# Altium PCB sumo.PcbDoc (part 2 of 2)
Units mm, origin at the board's own origin, x right, y up, seen from the top; angles counter-clockwise.
Board outline 100 x 100 mm, 2 copper layers (Top Layer, Bottom Layer); 167 components, 120 nets, 498 pads, 1066 vias.
Unrouted connection lines stored in the file: 60.
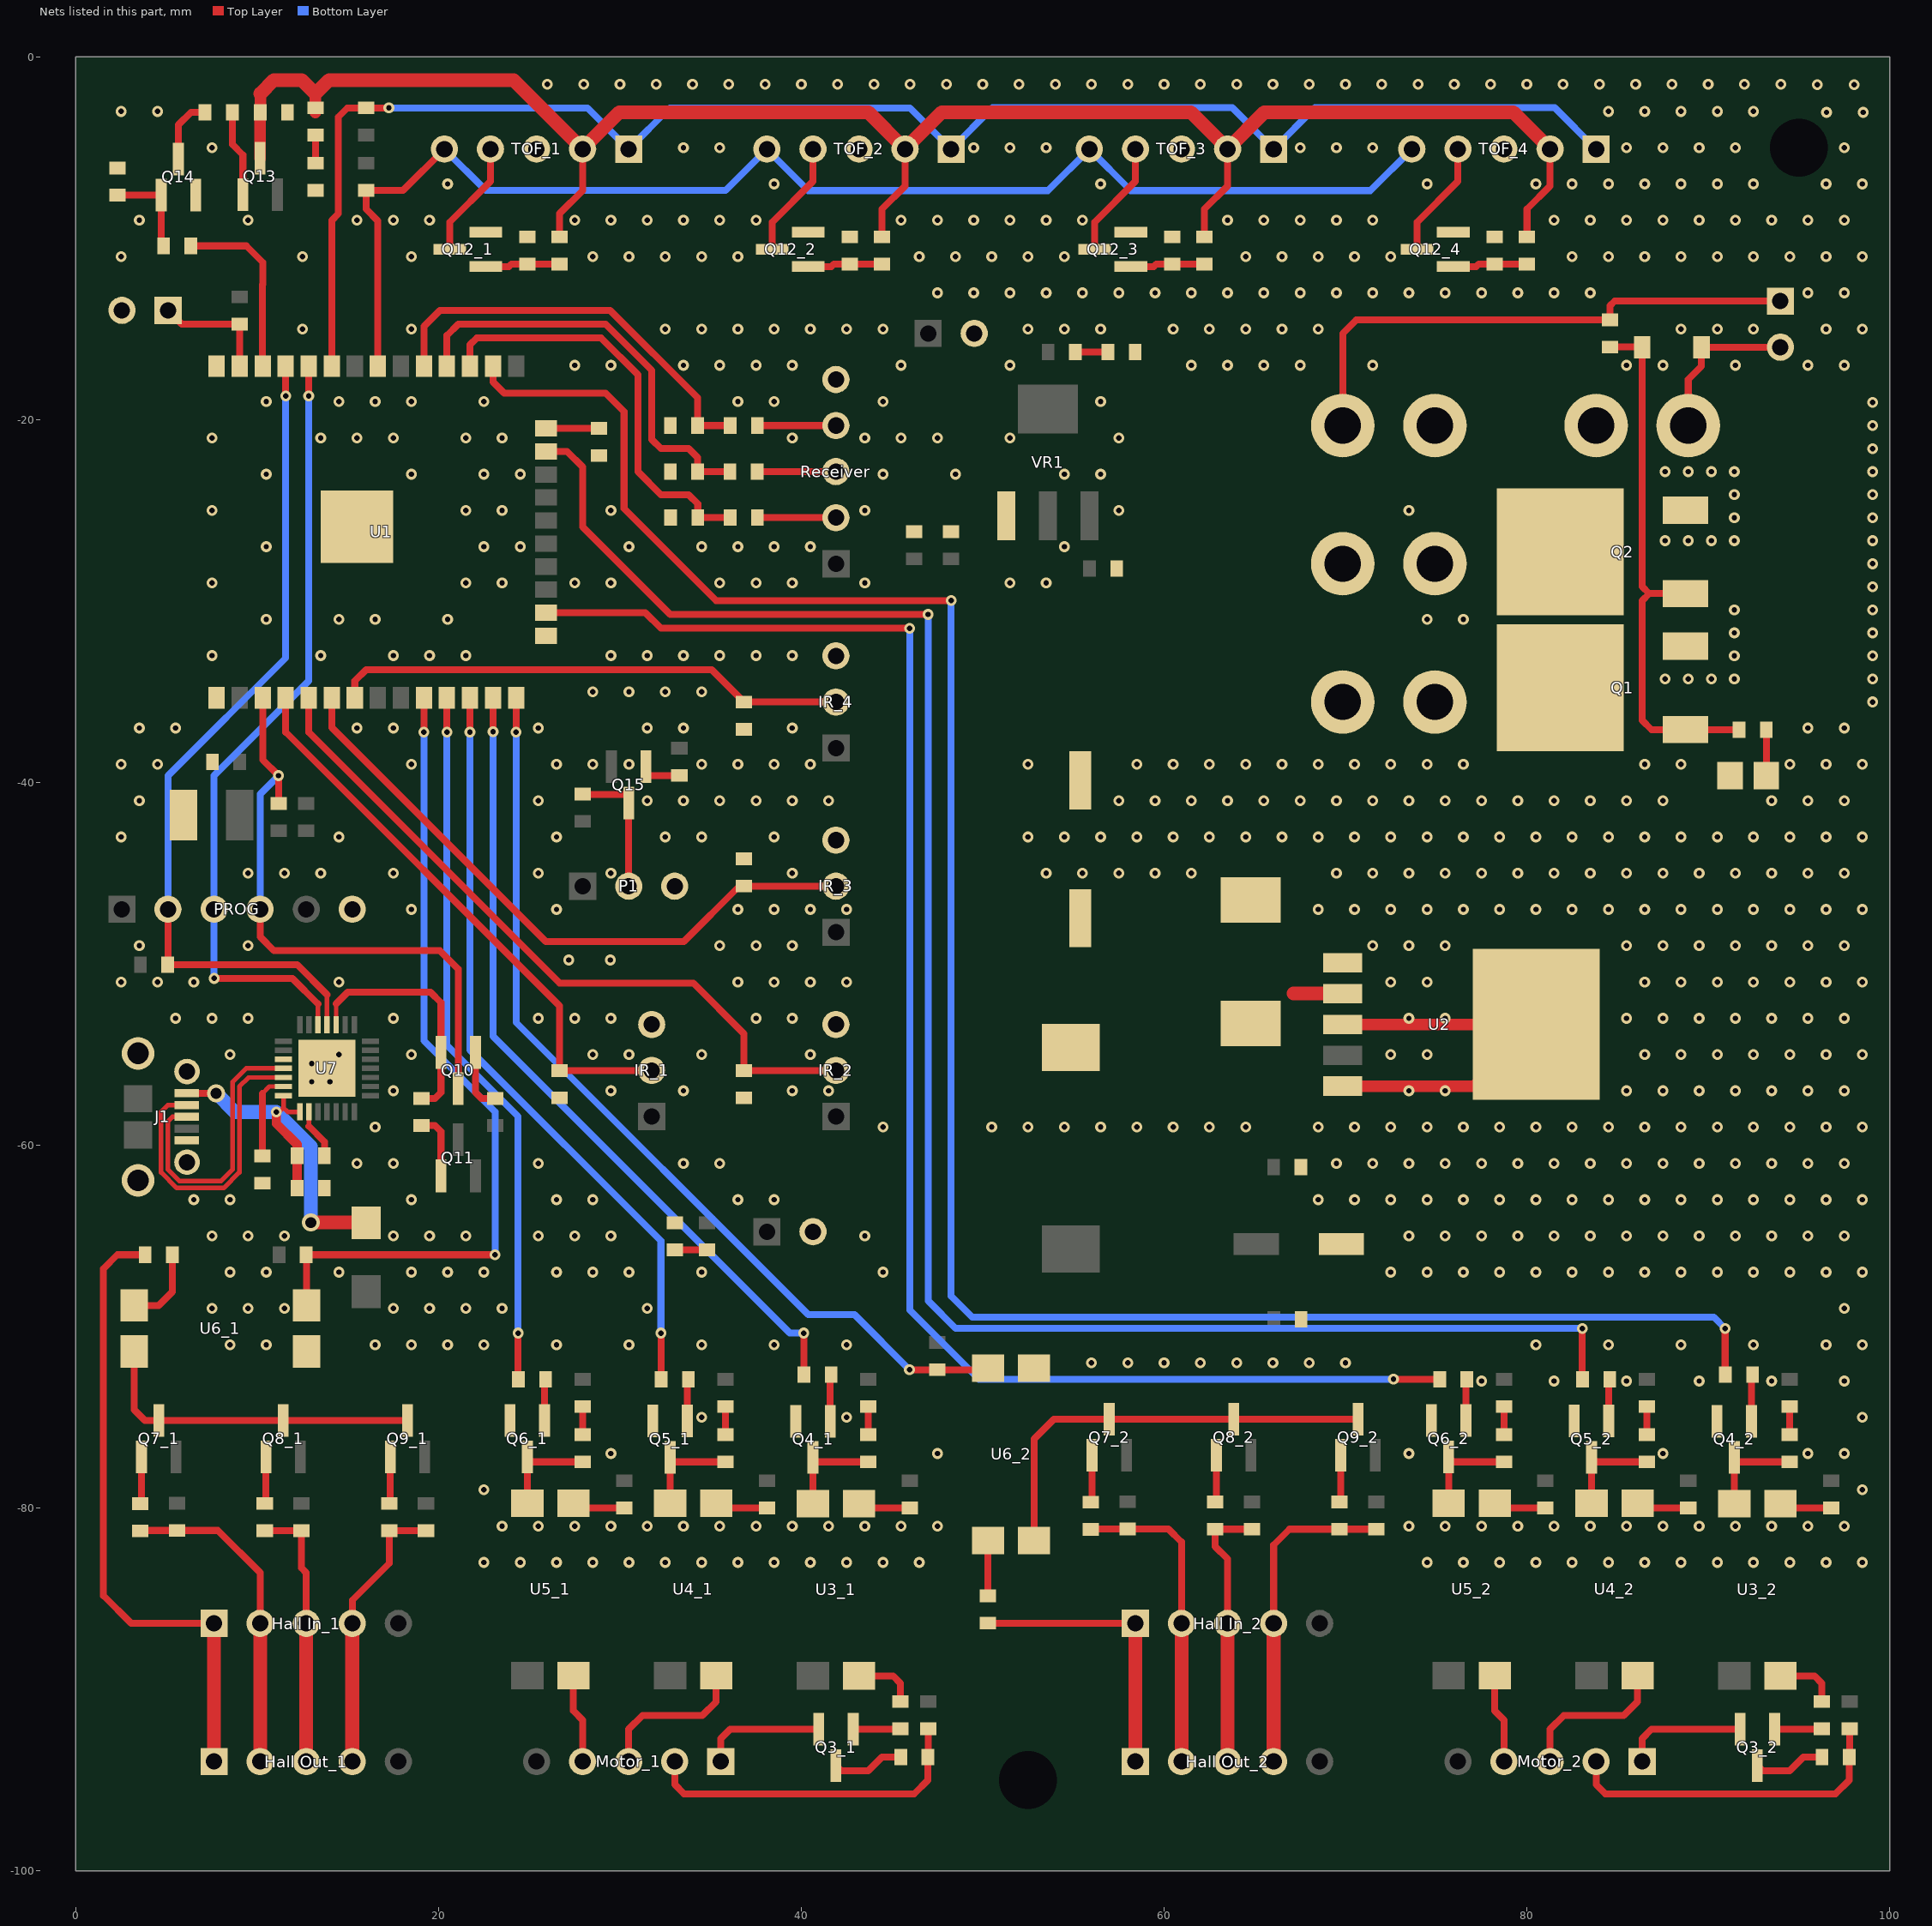
[diagram p2: the nets of this part, all layers, seen from the top]

## Via types
v1: diameter 0.6, hole 0.3, Top Layer to Bottom Layer, tented both sides, 989 vias
v2: diameter 0.6, hole 0.3, Top Layer to Bottom Layer, 38 vias
v3: diameter 0.6, hole 0.3, Top Layer to Bottom Layer, tented top, 31 vias
v4: diameter 1, hole 0.6, Top Layer to Bottom Layer, 8 vias

## Nets (pads, with @x,y where several pads share a name; then routed paths per layer and width w, separated by ;. In a path a pad name is that pad's centre, name@x,y a point inside that pad or via, vN(x,y) a via of type N, cw(c..) or ccw(c..) an arc to the next point about the centre after c; other vN are vias at no path point) (continued)
EN: PROG.4 Q10.3 R3.1 U1.3 | length 33.7
  Top Layer w0.381: PROG.4@10.16,-46.99 10.16,-48.514 10.922,-49.276 20.066,-49.276 21.082,-50.292 Q10.3@21.082,-56.88 ; U1.3@10.3,-35.335 10.3,-38.748 v2(11.176,-39.624) R3.1@11.176,-41.16
  Bottom Layer w0.381: PROG.4@10.16,-46.99 10.16,-40.64 v2(11.176,-39.624)
GND_1: 3V3.2 5V.2 "Controller 1.2" "Controller 2.2" C1.2 C2.1 C3.2 C4.2 C5.2 C6.1 C7.1 C8.1 C10.1 C11.1 C13_1.1 C13_2.1 C13_3.1 C13_4.1 C14.1 C15.1 D1.1 D7.2 D8.2 D9.2 IR_1.3 IR_2.3 IR_3.3 IR_4.3 J1.5 J1.6 J1.7 J1.8 J1.9 P1.3 P2.2 PROG.6 Q1.2 Q2.2 Q4_1.2 Q4_2.2 Q5_1.2 Q5_2.2 Q6_1.2 Q6_2.2 Q12_1.2 Q12_2.2 Q12_3.2 Q12_4.2 Q14.2 R8.1 R34.1 R35.1 R36.1 R37_1.1 R37_2.1 R37_3.1 R37_4.1 R38.2 R42.1 Receiver.5 TOF_1.3 TOF_2.3 TOF_3.3 TOF_4.3 U1.1 U1.15 U1.38 U1.39 U2.3 U2.5 U2.6 U6_1.3 U6_2.3 U7.3 U7.29 VR1.1 | length 23
  Top Layer w0.381: Q5_1.2@31.75,-74.676 Q5_1.2@31.816,-74.742 ; Q5_1.2@31.816,-75.2 Q5_1.2@31.832,-75.184 ; Q5_2.2@82.55,-74.676 Q5_2.2@82.616,-74.742 ; Q5_2.2@82.616,-75.2 Q5_2.2@82.632,-75.184
  Top Layer w0.635: U2.5@69.843,-56.74 77.118,-56.74 U2.6@80.518,-53.34 U2.3@69.843,-53.34
  other v1: 22.5,-83 24.5,-83 26.5,-83 28.5,-83 30.5,-83 32.5,-83 34.5,-83 36.5,-83 38.5,-83 40.5,-83 42.5,-83 44.5,-83 46.5,-83 74.5,-83 76.5,-83 78.5,-83 80.5,-83 82.5,-83 84.5,-83 86.5,-83 88.5,-83 90.5,-83 92.5,-83 94.5,-83 96.5,-83 98.5,-83 23.5,-81 25.5,-81 27.5,-81 29.5,-81 31.5,-81 33.5,-81 35.5,-81 37.5,-81 39.5,-81 41.5,-81 43.5,-81 45.5,-81 47.5,-81 73.5,-81 75.5,-81 77.5,-81 79.5,-81 81.5,-81 83.5,-81 85.5,-81 87.5,-81 89.5,-81 91.5,-81 93.5,-81 95.5,-81 97.5,-81 22.5,-79 98.5,-79 29.5,-77 47.5,-77 73.5,-77 87.5,-77 95.5,-77 97.5,-77 34.5,-75 42.5,-75 98.5,-75 77.5,-73 81.5,-73 85.5,-73 89.5,-73 93.5,-73 97.5,-73 56,-72 58,-72 60,-72 62,-72 64,-72 66,-72 68,-72 70,-72 8.5,-71 10.5,-71 16.5,-71 18.5,-71 20.5,-71 22.5,-71 26.5,-71 30.5,-71 34.5,-71 38.5,-71 42.5,-71 80.5,-71 84.5,-71 88.5,-71 92.5,-71 96.5,-71 98.5,-71 7.5,-69 9.5,-69 11.5,-69 17.5,-69 19.5,-69 21.5,-69 23.5,-69 31.5,-69 97.5,-69 8.5,-67 10.5,-67 14.5,-67 18.5,-67 20.5,-67 22.5,-67 26.5,-67 28.5,-67 30.5,-67 34.5,-67 44.5,-67 72.5,-67 74.5,-67 76.5,-67 78.5,-67 80.5,-67 82.5,-67 84.5,-67 86.5,-67 88.5,-67 90.5,-67 92.5,-67 94.5,-67 96.5,-67 98.5,-67 7.5,-65 9.5,-65 11.5,-65 17.5,-65 19.5,-65 21.5,-65 25.5,-65 27.5,-65 29.5,-65 43.5,-65 73.5,-65 75.5,-65 77.5,-65 79.5,-65 81.5,-65 83.5,-65 85.5,-65 87.5,-65 89.5,-65 91.5,-65 93.5,-65 95.5,-65 97.5,-65 6.5,-63 8.5,-63 18.5,-63 26.5,-63 28.5,-63 36.5,-63 38.5,-63 68.5,-63 70.5,-63 72.5,-63 74.5,-63 76.5,-63 78.5,-63 80.5,-63 82.5,-63 84.5,-63 86.5,-63 88.5,-63 90.5,-63 92.5,-63 94.5,-63 96.5,-63 98.5,-63 15.5,-61 17.5,-61 25.5,-61 33.5,-61 35.5,-61 69.5,-61 71.5,-61 73.5,-61 75.5,-61 77.5,-61 79.5,-61 81.5,-61 83.5,-61 85.5,-61 87.5,-61 89.5,-61 91.5,-61 93.5,-61 95.5,-61 97.5,-61 16.5,-59 44.5,-59 50.5,-59 52.5,-59 54.5,-59 56.5,-59 58.5,-59 60.5,-59 62.5,-59 64.5,-59 68.5,-59 70.5,-59 72.5,-59 74.5,-59 76.5,-59 78.5,-59 80.5,-59 82.5,-59 84.5,-59 86.5,-59 88.5,-59 90.5,-59 92.5,-59 94.5,-59 96.5,-59 98.5,-59 17.5,-57 29.5,-57 33.5,-57 39.5,-57 41.5,-57 73.5,-57 75.5,-57 85.5,-57 87.5,-57 89.5,-57 91.5,-57 93.5,-57 95.5,-57 97.5,-57 8.5,-55 18.5,-55 28.5,-55 30.5,-55 34.5,-55 40.5,-55 72.5,-55 74.5,-55 86.5,-55 88.5,-55 90.5,-55 92.5,-55 94.5,-55 96.5,-55 98.5,-55 5.5,-53 7.5,-53 9.5,-53 17.5,-53 25.5,-53 27.5,-53 29.5,-53 37.5,-53 39.5,-53 73.5,-53 75.5,-53 85.5,-53 87.5,-53 89.5,-53 91.5,-53 93.5,-53 95.5,-53 97.5,-53 2.5,-51 4.5,-51 6.5,-51 14.5,-51 36.5,-51 38.5,-51 40.5,-51 42.5,-51 72.5,-51 74.5,-51 86.5,-51 88.5,-51 90.5,-51 92.5,-51 94.5,-51 96.5,-51 98.5,-51 3.5,-49 9.5,-49 35.5,-49 37.5,-49 39.5,-49 71.5,-49 73.5,-49 75.5,-49 85.5,-49 87.5,-49 89.5,-49 91.5,-49 93.5,-49 95.5,-49 97.5,-49 18.5,-47 26.5,-47 36.5,-47 38.5,-47 40.5,-47 42.5,-47 68.5,-47 70.5,-47 72.5,-47 74.5,-47 76.5,-47 78.5,-47 80.5,-47 82.5,-47 84.5,-47 86.5,-47 88.5,-47 90.5,-47 92.5,-47 94.5,-47 96.5,-47 98.5,-47 9.5,-45 11.5,-45 13.5,-45 17.5,-45 25.5,-45 29.5,-45 39.5,-45 53.5,-45 55.5,-45 57.5,-45 59.5,-45 61.5,-45 69.5,-45 71.5,-45 73.5,-45 75.5,-45 77.5,-45 79.5,-45 81.5,-45 83.5,-45 85.5,-45 87.5,-45 89.5,-45 91.5,-45 93.5,-45 95.5,-45 97.5,-45 2.5,-43 14.5,-43 26.5,-43 32.5,-43 34.5,-43 38.5,-43 52.5,-43 54.5,-43 56.5,-43 58.5,-43 60.5,-43 62.5,-43 64.5,-43 66.5,-43 68.5,-43 70.5,-43 72.5,-43 74.5,-43 76.5,-43 78.5,-43 80.5,-43 82.5,-43 84.5,-43 86.5,-43 88.5,-43 90.5,-43 92.5,-43 94.5,-43 96.5,-43 98.5,-43 3.5,-41 25.5,-41 31.5,-41 33.5,-41 35.5,-41 37.5,-41 39.5,-41 41.5,-41 57.5,-41 59.5,-41 61.5,-41 63.5,-41 65.5,-41 67.5,-41 69.5,-41 71.5,-41 73.5,-41 75.5,-41 77.5,-41 79.5,-41 81.5,-41 83.5,-41 85.5,-41 87.5,-41 93.5,-41 95.5,-41 97.5,-41 2.5,-39 4.5,-39 18.5,-39 26.5,-39 28.5,-39 30.5,-39 34.5,-39 36.5,-39 38.5,-39 40.5,-39 52.5,-39 58.5,-39 60.5,-39 62.5,-39 64.5,-39 66.5,-39 68.5,-39 70.5,-39 72.5,-39 74.5,-39 76.5,-39 86.5,-39 88.5,-39 94.5,-39 96.5,-39 98.5,-39 3.5,-37 5.5,-37 15.5,-37 17.5,-37 25.5,-37 31.5,-37 33.5,-37 39.5,-37 95.5,-37 97.5,-37 28.5,-35 30.5,-35 32.5,-35 34.5,-35 7.5,-33 13.5,-33 17.5,-33 19.5,-33 21.5,-33 29.5,-33 31.5,-33 33.5,-33 35.5,-33 37.5,-33 39.5,-33 10.5,-31 14.5,-31 16.5,-31 20.5,-31 74.5,-31 76.5,-31 7.5,-29 21.5,-29 23.5,-29 27.5,-29 29.5,-29 35.5,-29 37.5,-29 39.5,-29 43.5,-29 51.5,-29 53.5,-29 10.5,-27 22.5,-27 24.5,-27 30.5,-27 34.5,-27 36.5,-27 38.5,-27 40.5,-27 54.5,-27 7.5,-25 21.5,-25 23.5,-25 29.5,-25 43.5,-25 57.5,-25 73.5,-25 10.5,-23 18.5,-23 22.5,-23 24.5,-23 44.5,-23 48.5,-23 54.5,-23 56.5,-23 7.5,-21 13.5,-21 15.5,-21 17.5,-21 21.5,-21 23.5,-21 39.5,-21 43.5,-21 45.5,-21 47.5,-21 51.5,-21 57.5,-21 10.5,-19 14.5,-19 16.5,-19 18.5,-19 22.5,-19 36.5,-19 38.5,-19 44.5,-19 56.5,-19 27.5,-17 29.5,-17 33.5,-17 35.5,-17 37.5,-17 39.5,-17 45.5,-17 51.5,-17 61.5,-17 63.5,-17 65.5,-17 67.5,-17 71.5,-17 85.5,-17 87.5,-17 91.5,-17 95.5,-17 97.5,-17 12.5,-15 18.5,-15 32.5,-15 34.5,-15 36.5,-15 38.5,-15 40.5,-15 42.5,-15 44.5,-15 52.5,-15 54.5,-15 56.5,-15 60.5,-15 62.5,-15 64.5,-15 66.5,-15 68.5,-15 88.5,-15 90.5,-15 92.5,-15 96.5,-15 98.5,-15 47.5,-13 49.5,-13 51.5,-13 53.5,-13 55.5,-13 57.5,-13 59.5,-13 61.5,-13 63.5,-13 65.5,-13 67.5,-13 69.5,-13 71.5,-13 73.5,-13 75.5,-13 77.5,-13 79.5,-13 81.5,-13 83.5,-13 95.5,-13 97.5,-13 2.5,-11 12.5,-11 18.5,-11 28.5,-11 30.5,-11 32.5,-11 34.5,-11 36.5,-11 46.5,-11 48.5,-11 50.5,-11 52.5,-11 54.5,-11 64.5,-11 66.5,-11 68.5,-11 70.5,-11 72.5,-11 82.5,-11 84.5,-11 86.5,-11 88.5,-11 90.5,-11 92.5,-11 94.5,-11 96.5,-11 98.5,-11 3.5,-9 9.5,-9 15.5,-9 17.5,-9 19.5,-9 27.5,-9 29.5,-9 31.5,-9 33.5,-9 35.5,-9 37.5,-9 45.5,-9 47.5,-9 49.5,-9 51.5,-9 53.5,-9 55.5,-9 63.5,-9 65.5,-9 67.5,-9 69.5,-9 71.5,-9 81.5,-9 83.5,-9 85.5,-9 87.5,-9 89.5,-9 91.5,-9 93.5,-9 95.5,-9 97.5,-9 20.5,-7 38.5,-7 56.5,-7 74.5,-7 80.5,-7 82.5,-7 84.5,-7 86.5,-7 88.5,-7 90.5,-7 92.5,-7 96.5,-7 98.5,-7 7.5,-5 33.5,-5 35.5,-5 49.5,-5 51.5,-5 53.5,-5 67.5,-5 69.5,-5 71.5,-5 85.5,-5 87.5,-5 89.5,-5 91.5,-5 97.5,-5 96.52,-3.048 98.552,-3.048 2.5,-3 4.5,-3 84.5,-3 86.5,-3 88.5,-3 90.5,-3 92.5,-3 96.012,-1.524 98.044,-1.524 26,-1.5 28,-1.5 30,-1.5 32,-1.5 34,-1.5 36,-1.5 38,-1.5 40,-1.5 42,-1.5 44,-1.5 46,-1.5 48,-1.5 50,-1.5 52,-1.5 54,-1.5 56,-1.5 58,-1.5 60,-1.5 62,-1.5 64,-1.5 66,-1.5 68,-1.5 70,-1.5 72,-1.5 74,-1.5 76,-1.5 78,-1.5 80,-1.5 82,-1.5 84,-1.5 86,-1.5 88,-1.5 90,-1.5 92,-1.5 94,-1.5
  other v2: 13,-56.5 14,-56.5 13,-55.5 14.5,-55 27.178,-49.784 29.464,-49.784
HALL_U_1: "Hall In_1.2" "Hall Out_1.2" R22_1.2 R25_1.2 | length 18
  Top Layer w0.381: R22_1.2@3.556,-81.264 3.58,-81.24 R25_1.2@5.588,-81.24 7.834,-81.24 10.16,-83.566 10.16,-86.36
  Top Layer w0.762: 10.16,-93.98 10.16,-86.36
HALL_U_2: "Hall In_2.2" "Hall Out_2.2" R22_2.2 R25_2.2 | length 17.4
  Top Layer w0.381: R22_2.2@55.961,-81.18 55.985,-81.156 R25_2.2@57.993,-81.156 60.239,-81.156 60.96,-81.877 60.96,-86.36
  Top Layer w0.762: 60.96,-93.98 60.96,-86.36
HALL_V_1: "Hall In_1.4" "Hall Out_1.4" R24_1.2 R27_1.2 | length 15.6
  Top Layer w0.381: 15.24,-86.36 15.24,-85.09 17.272,-83.058 R24_1.2@17.272,-81.252 R27_1.2@19.304,-81.252
  Top Layer w0.762: 15.24,-93.98 15.24,-86.36
HALL_V_2: "Hall In_2.4" "Hall Out_2.4" R24_2.2 R27_2.2 | length 18
  Top Layer w0.381: 66.04,-86.36 66.04,-82.042 66.914,-81.168 R24_2.2@69.677,-81.168 R27_2.2@71.709,-81.168
  Top Layer w0.762: 66.04,-93.98 66.04,-86.36
HALL_VCC_1: "Hall In_1.1" "Hall Out_1.1" R20_1.2 | length 35
  Top Layer w0.381: R20_1.2@3.822,-66.04 2.286,-66.04 1.524,-66.802 1.524,-84.836 3.048,-86.36 7.62,-86.36
  Top Layer w0.762: 7.62,-93.98 7.62,-86.36
HALL_VCC_2: "Hall In_2.1" "Hall Out_2.1" R20_2.2 | length 15.8
  Top Layer w0.381: R20_2.2@50.292,-86.348 58.408,-86.348 58.42,-86.36
  Top Layer w0.762: 58.42,-93.98 58.42,-86.36
HALL_W_1: "Hall In_1.3" "Hall Out_1.3" R23_1.2 R26_1.2 | length 14.9
  Top Layer w0.381: R23_1.2@10.414,-81.252 R26_1.2@12.446,-81.252 12.446,-83.312 12.7,-83.566 12.7,-86.36
  Top Layer w0.762: 12.7,-93.98 12.7,-86.36
HALL_W_2: "Hall In_2.3" "Hall Out_2.3" R23_2.2 R26_2.2 | length 15.1
  Top Layer w0.381: 63.5,-86.36 63.5,-82.804 62.819,-82.123 R23_2.2@62.819,-81.168 R26_2.2@64.851,-81.168
  Top Layer w0.762: 63.5,-93.98 63.5,-86.36
M_BRAKE_1: Motor_1.4 U5_1.4 | length 5
  Top Layer w0.381: U5_1.4@27.432,-89.24 27.432,-91.186 27.94,-91.694 Motor_1.4@27.94,-93.98
M_BRAKE_2: Motor_2.4 U5_2.4 | length 5
  Top Layer w0.381: U5_2.4@78.232,-89.24 78.232,-91.186 78.74,-91.694 Motor_2.4@78.74,-93.98
M_DIR_1: Motor_1.3 U4_1.4 | length 8.7
  Top Layer w0.381: Motor_1.3@30.48,-93.98 30.48,-92.202 31.242,-91.44 34.544,-91.44 35.306,-90.678 U4_1.4@35.306,-89.24
M_DIR_2: Motor_2.3 U4_2.4 | length 8.7
  Top Layer w0.381: Motor_2.3@81.28,-93.98 81.28,-92.202 82.042,-91.44 85.344,-91.44 86.106,-90.678 U4_2.4@86.106,-89.24
M_THROTTLE_1: C9_1.2 Motor_1.2 R16_1.1 | length 18.6
  Top Layer w0.381: Motor_1.2@33.02,-93.98 33.02,-95.25 33.528,-95.758 46.228,-95.758 46.978,-95.008 R16_1.1@46.978,-93.726 46.99,-93.714 C9_1.2@46.99,-92.174
M_THROTTLE_2: C9_2.2 Motor_2.2 R16_2.1 | length 18.6
  Top Layer w0.381: Motor_2.2@83.82,-93.98 83.82,-95.25 84.328,-95.758 97.028,-95.758 97.778,-95.008 R16_2.1@97.778,-93.726 97.79,-93.714 C9_2.2@97.79,-92.174
M_VCC_1: Motor_1.1 Q3_1.2 | length 6.9
  Top Layer w0.381: Motor_1.1@35.56,-93.98 35.56,-92.71 36.068,-92.202 Q3_1.2@40.96,-92.202
M_VCC_2: Motor_2.1 Q3_2.2 | length 6.9
  Top Layer w0.381: Motor_2.1@86.36,-93.98 86.36,-92.71 86.868,-92.202 Q3_2.2@91.76,-92.202
NetBT1_2: BT1.2 BT2.1
NetBT2_2: BT2.2 D2.1 Q1.3 Q2.3 VBAT.2 | length 9
  Top Layer w0.381: BT2.2@88.9,-20.32 88.9,-17.78 89.63,-17.05 D2.1@89.63,-16.002 VBAT.2@93.98,-16.002
  other v3: 99.06,-35.56 87.63,-34.29 88.9,-34.29 90.17,-34.29 91.44,-34.29 99.06,-34.29 91.44,-33.02 99.06,-33.02 91.44,-31.75 99.06,-31.75 91.44,-30.48 99.06,-30.48 99.06,-29.21 99.06,-27.94 87.63,-26.67 88.9,-26.67 90.17,-26.67 91.44,-26.67 99.06,-26.67 91.44,-25.4 99.06,-25.4 91.44,-24.13 99.06,-24.13 87.63,-22.86 88.9,-22.86 90.17,-22.86 91.44,-22.86 99.06,-22.86 99.06,-21.59 99.06,-20.32 99.06,-19.05
NetC6_2: C6.2 R2.2 | length 2.5
  Top Layer w0.381: C6.2@93.202,-39.624 93.206,-39.62 R2.2@93.206,-37.084
NetC11_2: C11.2 U7.6 | length 4.8
  Top Layer w0.254: 10.287,-57.15 10.673,-56.764 U7.6@11.449,-56.764
  Top Layer w0.381: C11.2@10.287,-60.591 10.287,-57.15
NetC12_1_2: C12_1.2 Q12_1.1 R37_1.2 | length 4.1
  Top Layer w0.381: Q12_1.1@22.606,-11.552 23.876,-11.552 24.01,-11.418 R37_1.2@24.892,-11.418 C12_1.2@26.67,-11.418
NetC12_2_2: C12_2.2 Q12_2.1 R37_2.2 | length 4.1
  Top Layer w0.381: Q12_2.1@40.386,-11.552 41.656,-11.552 41.79,-11.418 R37_2.2@42.672,-11.418 C12_2.2@44.45,-11.418
NetC12_3_2: C12_3.2 Q12_3.1 R37_3.2 | length 4.1
  Top Layer w0.381: Q12_3.1@58.166,-11.552 59.436,-11.552 59.57,-11.418 R37_3.2@60.452,-11.418 C12_3.2@62.23,-11.418
NetC12_4_2: C12_4.2 Q12_4.1 R37_4.2 | length 4.1
  Top Layer w0.381: Q12_4.1@75.946,-11.552 77.216,-11.552 77.35,-11.418 R37_4.2@78.232,-11.418 C12_4.2@80.01,-11.418
NetC13_1_2: C13_1.2 IR_1.2 U1.4 | length 31.9
  Top Layer w0.381: U1.4@11.57,-35.335 11.57,-37.224 26.67,-52.324 C13_1.2@26.67,-55.892 ; C13_1.2@26.67,-55.88 IR_1.2@31.75,-55.88
NetC13_2_2: C13_2.2 IR_2.2 U1.5 | length 39.9
  Top Layer w0.381: U1.5@12.84,-35.335 12.84,-37.224 26.67,-51.054 34.036,-51.054 36.83,-53.848 C13_2.2@36.83,-55.892 ; C13_2.2@36.83,-55.88 IR_2.2@41.91,-55.88
NetC13_3_2: C13_3.2 IR_3.2 U1.6 | length 35.6
  Top Layer w0.381: U1.6@14.11,-35.335 14.11,-36.97 25.908,-48.768 33.528,-48.768 36.564,-45.732 C13_3.2@36.83,-45.732 ; C13_3.2@36.83,-45.72 IR_3.2@41.91,-45.72
NetC13_4_2: C13_4.2 IR_4.2 U1.7 | length 28.5
  Top Layer w0.381: U1.7@15.38,-35.335 15.38,-34.404 16.002,-33.782 35.052,-33.782 C13_4.2@36.83,-35.56 ; C13_4.2@36.83,-35.572 C13_4.2@36.83,-35.56 ; IR_4.2@41.91,-35.56 C13_4.2@36.83,-35.56
NetD1_2: D1.2 L1.1 U2.2 | length 2.7
  Top Layer w0.762: 67.134,-51.64 U2.2@69.843,-51.64
NetD2_2: D2.2 Q1.1 Q2.1 R1.1 R2.1 | length 30.2
  Top Layer w0.381: R1.1@84.582,-15.99 86.348,-15.99 D2.2@86.36,-16.002 86.36,-29.196 86.748,-29.584 ; Q2.1@88.74,-29.584 86.748,-29.584 ; R2.1@91.706,-37.084 Q1.1@88.74,-37.084 86.868,-37.084 86.36,-36.576 86.36,-29.972 86.748,-29.584
NetD3_1_1: D3_1.1 R10_1.1 | length 1.5
  Top Layer w0.381: D3_1.1@43.688,-75.958 R10_1.1@43.688,-74.41
NetD3_1_2: D3_1.2 Q4_1.3 U3_1.2 | length 5.7
  Top Layer w0.381: U3_1.2@40.64,-79.756 Q4_1.3@40.64,-77.216 40.882,-77.458 D3_1.2@43.688,-77.458
NetD3_2_1: D3_2.1 R10_2.1 | length 1.5
  Top Layer w0.381: D3_2.1@94.488,-75.958 R10_2.1@94.488,-74.41
NetD3_2_2: D3_2.2 Q4_2.3 U3_2.2 | length 5.7
  Top Layer w0.381: U3_2.2@91.44,-79.756 Q4_2.3@91.44,-77.216 91.682,-77.458 D3_2.2@94.488,-77.458
NetD4_1_1: D4_1.1 R12_1.1 | length 1.5
  Top Layer w0.381: D4_1.1@35.814,-75.958 R12_1.1@35.814,-74.41
NetD4_1_2: D4_1.2 Q5_1.3 U4_1.2 | length 5.7
  Top Layer w0.381: U4_1.2@32.766,-79.74 Q5_1.3@32.766,-77.2 33.024,-77.458 D4_1.2@35.814,-77.458
NetD4_2_1: D4_2.1 R12_2.1 | length 1.5
  Top Layer w0.381: D4_2.1@86.614,-75.958 R12_2.1@86.614,-74.41
NetD4_2_2: D4_2.2 Q5_2.3 U4_2.2 | length 5.7
  Top Layer w0.381: U4_2.2@83.566,-79.74 Q5_2.3@83.566,-77.2 83.824,-77.458 D4_2.2@86.614,-77.458
NetD5_1_1: D5_1.1 R14_1.1 | length 1.5
  Top Layer w0.381: D5_1.1@27.94,-75.958 R14_1.1@27.94,-74.41
NetD5_1_2: D5_1.2 Q6_1.3 U5_1.2 | length 5.7
  Top Layer w0.381: U5_1.2@24.892,-79.74 Q6_1.3@24.892,-77.184 25.166,-77.458 D5_1.2@27.94,-77.458
NetD5_2_1: D5_2.1 R14_2.1 | length 1.5
  Top Layer w0.381: D5_2.1@78.74,-75.958 R14_2.1@78.74,-74.41
NetD5_2_2: D5_2.2 Q6_2.3 U5_2.2 | length 5.7
  Top Layer w0.381: U5_2.2@75.692,-79.74 Q6_2.3@75.692,-77.184 75.966,-77.458 D5_2.2@78.74,-77.458
NetD7_1: D7.1 R45.1 | length 1.8
  Top Layer w0.381: R45.1@55.106,-16.256 D7.1@56.908,-16.256
NetD8_1: D8.1 R46.1 | length 1.8
  Top Layer w0.381: D8.1@33.02,-65.774 R46.1@34.798,-65.774
NetD9_1: D9.1 R47.1 | length 1.5
  Top Layer w0.381: D9.1@13.208,-5.854 R47.1@13.208,-4.306
NetJ1_2: J1.2 U7.5 | length 17.3
  Top Layer w0.254: J1.2@6.104,-57.786 5.079,-57.786 4.699,-58.166 4.699,-61.499 5.557,-62.357 8.159,-62.357 9.017,-61.499 9.017,-56.769 9.522,-56.264 U7.5@11.449,-56.264
NetJ1_3: J1.3 U7.4 | length 15.8
  Top Layer w0.254: J1.3@6.104,-58.436 5.318,-58.436 5.08,-58.674 5.08,-61.341 5.715,-61.976 8.001,-61.976 8.636,-61.341 8.636,-56.515 9.387,-55.764 U7.4@11.449,-55.764
NetP1_2: P1.2 Q15.3 R44.1 | length 7.9
  Top Layer w0.381: R44.1@27.686,-40.652 30.48,-40.652 Q15.3@30.48,-41.132 P1.2@30.48,-45.72
NetQ3_1_1: Q3_1.1 R15_1.2 | length 2.6
  Top Layer w0.381: Q3_1.1@42.86,-92.202 45.438,-92.202 R15_1.2@45.466,-92.174
NetQ3_1_3: Q3_1.3 R16_1.2 | length 4
  Top Layer w0.381: Q3_1.3@41.91,-94.202 42.196,-94.488 43.688,-94.488 44.45,-93.726 R16_1.2@45.478,-93.726
NetQ3_2_1: Q3_2.1 R15_2.2 | length 2.6
  Top Layer w0.381: Q3_2.1@93.66,-92.202 96.238,-92.202 R15_2.2@96.266,-92.174
NetQ3_2_3: Q3_2.3 R16_2.2 | length 4
  Top Layer w0.381: Q3_2.3@92.71,-94.202 92.996,-94.488 94.488,-94.488 95.25,-93.726 R16_2.2@96.278,-93.726
NetQ4_1_1: Q4_1.1 R17_1.2 | length 2.6
  Top Layer w0.381: Q4_1.1@41.59,-75.216 41.59,-72.698 R17_1.2@41.644,-72.644
NetQ4_2_1: Q4_2.1 R17_2.2 | length 2.6
  Top Layer w0.381: Q4_2.1@92.39,-75.216 92.39,-72.698 R17_2.2@92.444,-72.644
NetQ5_1_1: Q5_1.1 R18_1.2 | length 2.3
  Top Layer w0.381: Q5_1.1@33.716,-75.2 33.716,-72.952 R18_1.2@33.77,-72.898
NetQ5_2_1: Q5_2.1 R18_2.2 | length 2.3
  Top Layer w0.381: Q5_2.1@84.516,-75.2 84.516,-72.952 R18_2.2@84.57,-72.898
NetQ6_1_1: Q6_1.1 R19_1.2 | length 2.4
  Top Layer w0.381: R19_1.2@25.896,-72.898 25.842,-72.952 Q6_1.1@25.842,-75.184 Q6_1.1@25.92,-75.106
NetQ6_2_1: Q6_2.1 R19_2.2 | length 2.4
  Top Layer w0.381: R19_2.2@76.696,-72.898 76.642,-72.952 Q6_2.1@76.642,-75.184 Q6_2.1@76.72,-75.106
NetQ7_1_1: Q7_1.1 R22_1.1 | length 2.6
  Top Layer w0.381: R22_1.1@3.556,-79.764 3.622,-79.698 Q7_1.1@3.622,-77.184
NetQ7_1_3: Q7_1.3 Q8_1.3 Q9_1.3 U6_1.2 | length 18.5
  Top Layer w0.381: U6_1.2@3.216,-71.374 3.216,-74.59 3.81,-75.184 Q7_1.3@4.572,-75.184 Q8_1.3@11.43,-75.184 Q9_1.3@18.288,-75.184
NetQ7_2_1: Q7_2.1 R22_2.1 | length 2.6
  Top Layer w0.381: R22_2.1@55.961,-79.68 56.027,-79.614 Q7_2.1@56.027,-77.1
NetQ7_2_3: Q7_2.3 Q8_2.3 Q9_2.3 U6_2.2 | length 23.9
  Top Layer w0.381: U6_2.2@52.832,-81.788 52.832,-76.197 53.929,-75.1 Q7_2.3@56.977,-75.1 Q8_2.3@63.835,-75.1 Q9_2.3@70.693,-75.1
NetQ8_1_1: Q8_1.1 R23_1.1 | length 2.6
  Top Layer w0.381: R23_1.1@10.414,-79.752 10.48,-79.686 Q8_1.1@10.48,-77.184
NetQ8_2_1: Q8_2.1 R23_2.1 | length 2.6
  Top Layer w0.381: R23_2.1@62.819,-79.668 62.885,-79.602 Q8_2.1@62.885,-77.1
NetQ9_1_1: Q9_1.1 R24_1.1 | length 2.6
  Top Layer w0.381: R24_1.1@17.272,-79.752 17.338,-79.686 Q9_1.1@17.338,-77.184
NetQ9_2_1: Q9_2.1 R24_2.1 | length 2.6
  Top Layer w0.381: R24_2.1@69.677,-79.668 69.743,-79.602 Q9_2.1@69.743,-77.1
NetQ10_1: Q10.1 R29.2 | length 3.2
  Top Layer w0.381: Q10.1@22.032,-54.88 22.032,-57.084 22.364,-57.416 R29.2@22.86,-57.416
NetQ11_1: Q11.1 R30.2 | length 3.7
  Top Layer w0.381: R30.2@19.05,-58.916 19.8,-58.916 20.132,-59.248 Q11.1@20.132,-61.69
NetQ13_1: Q13.1 R40.1 | length 4.8
  Top Layer w0.381: R40.1@8.624,-3.048 8.624,-4.814 9.21,-5.4 Q13.1@9.21,-7.588
NetQ14_1: Q14.1 R38.1 R41.1 | length 5
  Top Layer w0.381: R38.1@2.286,-7.62 Q14.1@4.704,-7.62 4.704,-10.038 R41.1@4.826,-10.16
NetQ14_3: Q14.3 R40.2 | length 3.6
  Top Layer w0.381: Q14.3@5.654,-5.62 5.654,-3.744 6.35,-3.048 R40.2@7.124,-3.048
NetQ15_1: Q15.1 R43.1 | length 2.3
  Top Layer w0.381: Q15.1@31.43,-39.132 31.43,-39.558 31.484,-39.612 R43.1@33.274,-39.612
NetR8_2: R8.2 U1.24 | length 2.9
  Top Layer w0.381: U1.24@25.921,-20.478 R8.2@28.848,-20.478
NetR9_1_1: R9_1.1 U3_1.1 | length 2.9
  Top Layer w0.381: U3_1.1@43.18,-79.756 43.422,-79.998 R9_1.1@45.974,-79.998
NetR9_2_1: R9_2.1 U3_2.1 | length 2.9
  Top Layer w0.381: U3_2.1@93.98,-79.756 94.222,-79.998 R9_2.1@96.774,-79.998
NetR11_1_1: R11_1.1 U4_1.1 | length 2.9
  Top Layer w0.381: U4_1.1@35.306,-79.74 35.564,-79.998 R11_1.1@38.1,-79.998
NetR11_2_1: R11_2.1 U4_2.1 | length 2.9
  Top Layer w0.381: U4_2.1@86.106,-79.74 86.364,-79.998 R11_2.1@88.9,-79.998
NetR13_1_1: R13_1.1 U5_1.1 | length 2.9
  Top Layer w0.381: U5_1.1@27.432,-79.74 27.69,-79.998 R13_1.1@30.226,-79.998
NetR13_2_1: R13_2.1 U5_2.1 | length 2.9
  Top Layer w0.381: U5_2.1@78.232,-79.74 78.49,-79.998 R13_2.1@81.026,-79.998
NetR15_1_1: R15_1.1 U3_1.4 | length 3.5
  Top Layer w0.381: U3_1.4@43.18,-89.256 45.06,-89.256 45.466,-89.662 R15_1.1@45.466,-90.674
NetR15_2_1: R15_2.1 U3_2.4 | length 3.5
  Top Layer w0.381: U3_2.4@93.98,-89.256 95.86,-89.256 96.266,-89.662 R15_2.1@96.266,-90.674
NetR17_1_1: R17_1.1 U1.13 | length 44.9
  Top Layer w0.381: v2(23,-37.198) U1.13@23,-35.335 ; v2(40.132,-70.358) 40.132,-72.632 R17_1.1@40.144,-72.644
  Bottom Layer w0.381: v2(23,-37.198) 23,-53.988 39.37,-70.358 v2(40.132,-70.358)
NetR17_2_1: R17_2.1 U1.26 | length 118.6
  Top Layer w0.381: U1.26@23,-17.047 23,-17.92 23.622,-18.542 29.21,-18.542 30.226,-19.558 30.226,-24.892 35.306,-29.972 v2(48.26,-29.972) ; v2(90.932,-70.104) 90.932,-72.632 R17_2.1@90.944,-72.644
  Bottom Layer w0.381: v2(48.26,-29.972) 48.26,-68.326 49.421,-69.487 90.315,-69.487 v2(90.932,-70.104)
NetR18_1_1: R18_1.1 U1.12 | length 41.9
  Top Layer w0.381: v2(21.73,-37.224) U1.12@21.73,-35.335 ; v2(32.258,-70.358) 32.27,-70.37 R18_1.1@32.27,-72.898
  Bottom Layer w0.381: v2(21.73,-37.224) 21.73,-54.75 32.258,-65.278 v2(32.258,-70.358)
NetR18_2_1: R18_2.1 U1.23 | length 104.1
  Top Layer w0.381: U1.23@25.921,-21.748 27.082,-21.748 27.94,-22.606 27.94,-25.908 32.766,-30.734 v2(46.99,-30.734) ; v2(83.058,-70.104) 83.058,-72.886 R18_2.1@83.07,-72.898
  Bottom Layer w0.381: v2(46.99,-30.734) 46.99,-68.58 48.514,-70.104 v2(83.058,-70.104)
NetR19_1_1: R19_1.1 U1.11 | length 39.2
  Top Layer w0.381: v2(20.46,-37.224) U1.11@20.46,-35.335 ; v2(24.384,-70.358) 24.384,-72.886 R19_1.1@24.396,-72.898
  Bottom Layer w0.381: v2(20.46,-37.224) 20.46,-54.496 24.384,-58.42 v2(24.384,-70.358)
NetR19_2_1: R19_2.1 U1.16 | length 88.8
  Top Layer w0.381: U1.16@25.921,-30.638 31.4,-30.638 32.258,-31.496 v2(45.974,-31.496) ; v2(72.644,-72.898) R19_2.1@75.196,-72.898
  Bottom Layer w0.381: v2(45.974,-31.496) 45.974,-69.088 49.784,-72.898 v2(72.644,-72.898)
NetR20_1_1: R20_1.1 U6_1.1 | length 4.5
  Top Layer w0.381: U6_1.1@3.216,-68.834 4.572,-68.834 5.322,-68.084 R20_1.1@5.322,-66.04
NetR20_2_1: R20_2.1 U6_2.1 | length 3.1
  Top Layer w0.381: R20_2.1@50.292,-84.848 U6_2.1@50.292,-81.788
NetR21_1_1: R21_1.1 U1.10 U6_1.4 | length 45.5
  Top Layer w0.381: R21_1.1@12.7,-66.04 R21_1.1@12.716,-66.04 ; U6_1.4@12.716,-68.834 R21_1.1@12.716,-66.04 ; v2(19.19,-37.224) U1.10@19.19,-35.335 ; v2(23.114,-66.04) R21_1.1@12.716,-66.04
  Bottom Layer w0.381: v2(19.19,-37.224) 19.19,-54.242 23.114,-58.166 v2(23.114,-66.04)
NetR21_2_1: R21_2.1 U1.14 U6_2.4 | length 51.9
  Top Layer w0.381: v2(24.27,-37.224) U1.14@24.27,-35.335 ; v2(45.962,-72.378) R21_2.1@47.498,-72.378 50.202,-72.378 U6_2.4@50.292,-72.288
  Bottom Layer w0.381: v2(24.27,-37.224) 24.27,-53.226 40.386,-69.342 42.926,-69.342 v2(45.962,-72.378)
NetR28_1: R28.1 U7.9 | length 2.8
  Top Layer w0.254: 12.849,-58.95 U7.9@12.849,-58.164
  Top Layer w0.381: 12.849,-58.95 13.704,-59.805 R28.1@13.704,-60.579
NetR31_1: R31.1 R34.2 U1.29 | length 23
  Top Layer w0.381: U1.29@19.19,-17.047 19.19,-14.846 20.066,-13.97 29.464,-13.97 34.278,-18.784 R34.2@34.278,-20.32 R31.1@36.08,-20.32
NetR31_2: R31.2 Receiver.4 | length 4.3
  Top Layer w0.381: R31.2@37.58,-20.32 Receiver.4@41.91,-20.32
NetR32_1: R32.1 R35.2 U1.28 | length 23.6
  Top Layer w0.381: U1.28@20.46,-17.047 20.46,-15.354 21.082,-14.732 29.21,-14.732 31.75,-17.272 31.75,-21.082 32.258,-21.59 33.782,-21.59 34.278,-22.086 R35.2@34.278,-22.86 R32.1@36.068,-22.86
NetR32_2: R32.2 Receiver.3 | length 4.3
  Top Layer w0.381: R32.2@37.568,-22.86 Receiver.3@41.91,-22.86
NetR33_1: R33.1 R36.2 U1.27 | length 23.4
  Top Layer w0.381: U1.27@21.73,-17.047 21.73,-15.862 22.098,-15.494 28.956,-15.494 30.988,-17.526 30.988,-22.86 32.258,-24.13 33.782,-24.13 34.29,-24.638 R36.2@34.29,-25.4 R33.1@36.08,-25.4
NetR33_2: R33.2 Receiver.2 | length 4.3
  Top Layer w0.381: R33.2@37.58,-25.4 Receiver.2@41.91,-25.4
NetR41_2: R41.2 U1.36 | length 10.1
  Top Layer w0.381: R41.2@6.338,-10.414 9.398,-10.414 10.3,-11.316 10.3,-12.542 10.292,-12.549 10.292,-17.039 U1.36@10.3,-17.047
RTS: Q10.2 R30.1 U7.24 | length 13.6
  Top Layer w0.254: U7.24@14.349,-53.364 14.349,-52.199
  Top Layer w0.381: 14.349,-52.199 14.986,-51.562 19.558,-51.562 20.132,-52.136 Q10.2@20.132,-54.88 20.132,-57.084 19.8,-57.416 R30.1@19.05,-57.416
RXD: PROG.3 U1.34 U7.26 | length 43.4
  Top Layer w0.254: U7.26@13.349,-53.364 13.349,-52.211
  Top Layer w0.381: v2(7.62,-50.8) 11.938,-50.8 13.349,-52.211 ; v2(12.84,-18.682) U1.34@12.84,-17.047
  Bottom Layer w0.381: v2(7.62,-50.8) PROG.3@7.62,-46.99 7.62,-39.624 12.84,-34.404 v2(12.84,-18.682)
SCL: R5.1 TOF_1.5 TOF_2.5 TOF_3.5 TOF_4.5 U1.31 | length 74.2
  Top Layer w0.381: U1.31@16.65,-17.047 16.65,-9.03 16.002,-8.382 R5.1@16.002,-7.354 18.046,-7.354 TOF_1.5@20.32,-5.08
  Bottom Layer w0.381: TOF_1.5@20.32,-5.08 22.594,-7.354 35.826,-7.354 TOF_2.5@38.1,-5.08 40.386,-7.366 53.594,-7.366 TOF_3.5@55.88,-5.08 58.166,-7.366 71.374,-7.366 TOF_4.5@73.66,-5.08
SDA: R4.1 TOF_1.1 TOF_2.1 TOF_3.1 TOF_4.1 U1.33 | length 90.1
  Top Layer w0.381: U1.33@14.11,-17.047 14.11,-9.004 14.478,-8.636 14.478,-3.302 14.974,-2.806 R4.1@16.002,-2.806 v2(17.26,-2.806)
  Bottom Layer w0.381: v2(17.26,-2.806) 18.288,-2.806 28.206,-2.806 TOF_1.1@30.48,-5.08 32.754,-2.806 45.986,-2.806 TOF_2.1@48.26,-5.08 50.546,-2.794 63.754,-2.794 TOF_3.1@66.04,-5.08 68.326,-2.794 81.534,-2.794 TOF_4.1@83.82,-5.08
SW: P2.1 R39.1 U1.37 | length 6.6
  Top Layer w0.381: P2.1@5.08,-13.97 5.842,-14.732 R39.1@9.03,-14.732 U1.37@9.03,-17.047
TOF_VCC: C12_1.1 C12_2.1 C12_3.1 C12_4.1 Q13.3 R42.2 R47.2 TOF_1.2 TOF_2.2 TOF_3.2 TOF_4.2 | length 104.8
  Top Layer w0.381: Q13.3@10.16,-5.588 Q13.3@10.172,-5.576 ; C12_1.1@26.67,-9.918 26.67,-8.636 27.94,-7.366 TOF_1.2@27.94,-5.08 ; C12_2.1@44.45,-9.918 44.45,-8.382 45.72,-7.112 TOF_2.2@45.72,-5.08 ; C12_3.1@62.23,-9.918 62.23,-8.382 63.5,-7.112 TOF_3.2@63.5,-5.08 ; C12_4.1@80.01,-9.918 80.01,-8.382 81.28,-7.112 TOF_4.2@81.28,-5.08
  Top Layer w0.635: Q13.3@10.16,-5.588 10.16,-3.06 R42.2@10.172,-3.048 10.172,-2.02 ; R47.2@13.208,-3.06 13.208,-2.032
  Top Layer w0.762: 10.172,-2.02 10.922,-1.27 12.446,-1.27 13.208,-2.032 13.97,-1.27 24.13,-1.27 TOF_1.2@27.94,-5.08 29.972,-3.048 43.688,-3.048 TOF_2.2@45.72,-5.08 47.752,-3.048 61.468,-3.048 TOF_3.2@63.5,-5.08 65.532,-3.048 79.248,-3.048 TOF_4.2@81.28,-5.08
TXD: PROG.2 R7.1 U1.35 U7.25 | length 46.8
  Top Layer w0.254: U7.25@13.849,-53.364 13.849,-51.695
  Top Layer w0.381: PROG.2@5.08,-46.99 5.08,-50.038 12.192,-50.038 13.849,-51.695 ; v2(11.57,-18.682) U1.35@11.57,-17.047
  Bottom Layer w0.381: PROG.2@5.08,-46.99 5.08,-39.624 11.57,-33.134 v2(11.57,-18.682)
VBAT: "Controller 1.1" "Controller 2.1" BT1.1 C4.1 R1.2 U2.1 VBAT.1 | length 31.8
  Top Layer w0.381: BT1.1@68.834,-19.304 BT1.1@69.85,-20.32 69.85,-15.24 70.6,-14.49 R1.2@84.582,-14.49 84.582,-13.716 84.836,-13.462 VBAT.1@93.98,-13.462
VUSB: C10.2 D6.1 J1.1 R28.2 U7.7 U7.8 | length 22.1
  Top Layer w0.254: v2(11.049,-58.166) 11.214,-58.166 11.449,-57.931 ; U7.7@11.449,-57.264 11.449,-57.931 ; U7.8@12.349,-58.164 11.682,-58.164 11.449,-57.931
  Top Layer w0.381: J1.1@6.104,-57.136 v4(7.733,-57.136)
  Top Layer w0.508: v2(11.049,-58.166) 11.049,-58.801 12.204,-59.956 R28.2@12.204,-60.579 C10.2@12.204,-62.357
  Top Layer w0.762: v4(12.954,-64.262) D6.1@16.002,-64.262
  Bottom Layer w0.762: v4(7.733,-57.136) 8.763,-58.166 v2(11.049,-58.166) 12.954,-60.071 v4(12.954,-64.262)
XSHUT_1: Q12_1.3 TOF_1.4 | length 6.5
  Top Layer w0.381: Q12_1.3@20.606,-10.602 20.606,-9.112 22.86,-6.858 TOF_1.4@22.86,-5.08
XSHUT_2: Q12_2.3 TOF_2.4 | length 6.5
  Top Layer w0.381: Q12_2.3@38.386,-10.602 38.386,-9.112 40.64,-6.858 TOF_2.4@40.64,-5.08
XSHUT_3: Q12_3.3 TOF_3.4 | length 6.5
  Top Layer w0.381: Q12_3.3@56.166,-10.602 56.166,-9.112 58.42,-6.858 TOF_3.4@58.42,-5.08
XSHUT_4: Q12_4.3 TOF_4.4 | length 6.5
  Top Layer w0.381: Q12_4.3@73.946,-10.602 73.946,-9.112 76.2,-6.858 TOF_4.4@76.2,-5.08
pads on no net: J1.4 J1.P$10 J1.P$11 U1.8 U1.9 U1.17 U1.18 U1.19 U1.20 U1.21 U1.22 U1.30 U1.32 U7.1 U7.2 U7.10 U7.11 U7.12 U7.13 U7.14 U7.15 U7.16 U7.17 U7.18 U7.19 U7.20 U7.21 U7.22 U7.23 U7.27

## Polygon pours and split planes (outlines as drawn)
GND_1 on Top Layer "Top Layer-GND_1" (solid, pour order 33): 0.254,-0.254 99.822,-0.254 99.822,-99.822 0.254,-99.822
VBAT on Top Layer "Top Layer-VBAT" (solid, pour order 21): 58.42,-17.78 72.136,-17.78 72.136,-38.1 51.308,-38.1 51.308,-45.466 59.69,-45.466 62.992,-48.768 70.866,-48.768 70.866,-50.8 46.482,-50.8 46.482,-35.306 50.8,-30.988 56.388,-30.988 58.42,-28.956
CONTROLLER_GND_2 on Top Layer "Top Layer-CONTROLLER_GND_2" (solid, pour order 9): 48.26,-73.406 57.658,-73.406 72.644,-73.406 72.644,-84.582 99.822,-84.582 99.822,-99.822 48.26,-99.822
NetBT2_2 on Top Layer "Top Layer-NetBT2_2" (solid, pour order 17): 99.568,-36.068 86.868,-36.068 86.868,-18.034 99.568,-18.034
NetBT1_2 on Top Layer "Top Layer-NetBT1_2" (solid, pour order 19): 83.566,-16.002 85.852,-18.288 85.852,-23.114 72.39,-23.114 72.39,-16.002
NetD1_2 on Top Layer "Top Layer-NetD1_2" (solid, pour order 15): 49.022,-51.054 68.326,-51.054 68.326,-53.848 65.278,-56.896 49.022,-56.896
5V on Top Layer "Top Layer-5V" (solid, pour order 11): 49.022,-70.612 57.912,-70.612 66.548,-70.612 66.548,-60.198 49.022,-60.198 49.022,-68.58
CONTROLLER_GND_1 on Top Layer "Top Layer-CONTROLLER_GND_1" (solid, pour order 8): 0.254,-63.754 6.858,-63.754 6.858,-73.406 21.844,-73.406 21.844,-84.582 48.006,-84.582 48.006,-99.822 0.254,-99.822
GND_1 on Bottom Layer "Bottom Layer-GND_1" (solid, pour order 35): 0.254,-0.254 99.822,-0.254 99.822,-99.822 0.254,-99.822
CONTROLLER_GND_2 on Bottom Layer "Top Layer-CONTROLLER_GND_2" (solid, pour order 31): 48.26,-73.406 57.658,-73.406 72.644,-73.406 72.644,-84.582 99.822,-84.582 99.822,-99.822 48.26,-99.822
CONTROLLER_GND_1 on Bottom Layer "Top Layer-CONTROLLER_GND_1" (solid, pour order 29): 0.254,-63.754 6.858,-63.754 6.858,-73.406 21.844,-73.406 21.844,-84.582 48.006,-84.582 48.006,-99.822 0.254,-99.822
VBAT on Bottom Layer "Bottom Layer-VBAT" (solid, pour order 27): 58.42,-17.78 72.136,-17.78 72.136,-38.1 58.42,-38.1
NetBT1_2 on Bottom Layer "NETBT1_2_L02_P025" (solid, pour order 25): 83.566,-16.002 85.852,-18.288 85.852,-23.114 72.39,-23.114 72.39,-16.002
NetBT2_2 on Bottom Layer "Bottom Layer-NetBT2_2" (solid, pour order 23): 99.568,-36.068 86.868,-36.068 86.868,-18.034 99.568,-18.034

## Other copper
Top Layer:
  pour cut-out: 66.802,-62.23 68.834,-64.262 68.834,-66.548 66.802,-68.58

## Silkscreen, mask and mechanical layers (free items; w line width, h text height)
Top Overlay:
  text "Justin Ong / Oct 2018 / Sumo Controller R1" at 48.006,-37.338 h1.4
  text "Brake" at 24.13,-69.596 h0.81
  text "DIR" at 32.258,-69.596 h0.81
  text "THROTTLE" at 38.608,-69.596 h0.81
  text "Brake" at 74.93,-69.596 h0.81
  text "DIR" at 83.058,-69.596 h0.81
  text "THROTTLE" at 89.408,-69.596 h0.81
  text "GND" at 76.962,-98.552 h0.81 r90
  text "BR" at 78.994,-98.552 h0.81 r90
  text "DIR" at 82.042,-99.822 h0.81 r90
  text "THR" at 84.074,-99.822 h0.81 r90
  text "VCC" at 86.106,-99.822 h0.81 r90
Bottom Solder:
  rectangle: 58.42,-38.1 72.136,-17.78
  region: 86.868,-18.034 99.568,-18.034 99.568,-36.068 86.868,-36.068
Mechanical 1:
  lines w0.152: 100,-100 0,-100 0,0 100,0 100,-100 ; 100,-100 100,-100
Drill Drawing:
  region: 72.39,-16.002 83.566,-16.002 85.852,-18.288 85.852,-23.114 72.39,-23.114